# EAGLE board test3 (EAGLE 7.6.0)

No outline drawn. Coordinates in mm, seen from the top.
Copper layers (1*16): Top 0.035mm / dielectric 1.5mm / Bottom 0.035mm
Design rules "SparkFun": minimum track width 7mil, minimum drill 15mil, track to track 8mil, track to pad 8mil, pad to pad 8mil, via to via 8mil, smd to smd 8mil, copper to edge 8mil, drill to drill 8mil, minimum pad ring 12mil, minimum via ring 10mil, stop-mask expansion 4mil, vias tented up to drill 20mil, thermal gap 10mil

## Footprints (pad centres in the part's own frame; a part is rotated, then mirrored left to right if it is on the bottom)
ANTENNA-CHIP5 = smd 1.016 x 2.54: FEED -3.302,0; NC 3.302,0
BALUN = smd 0.35 x 0.8: 1 -0.65,-0.8; 2 0,-0.8; 3 0.65,-0.8; 4 0.65,0.8; 5 0,0.8; 6 -0.65,0.8
0402-CAP = smd 0.7 x 0.9: 1 -0.65,0; 2 0.65,0
EIA3216 = smd 1.4 x 1.6: A 1.4,0; C -1.4,0
MICRO-FIDUCIAL = smd 0.635 x 0.635: 1 0,0
2X3-NS = drill 1.016 pad 1.88 square: 1 -2.54,-1.27 | drill 1.016 pad 1.88 octagon: 2 -2.54,1.27; 3 0,-1.27; 4 0,1.27; 5 2.54,-1.27; 6 2.54,1.27
POWER_JACK_PTH_LOCK = drill 2.997 pad 4.115: GND 0.025,6.557; GNDBREAK 3.762,10.7 | drill 3.2 pad 4.115: PWR 0,13.878
1X02_NO_SILK = drill 1.016 pad 1.88: 1 0,0; 2 2.54,0
1X04_NO_SILK = drill 1.016 pad 1.88 square: 1 0,0 | drill 1.016 pad 1.88: 2 2.54,0; 3 5.08,0; 4 7.62,0
1X06_NS = drill 1.016 pad 1.88: 1 0,0; 2 2.54,0; 3 5.08,0; 4 7.62,0; 5 10.16,0; 6 12.7,0
JST-2-PTH = drill 0.7 pad 1.448: 1 -1,0; 2 1,0
SCREWTERMINAL-3.5MM-2-NS = drill 1.2 pad 2.032 square: 1 0,0 | drill 1.2 pad 2.032: 2 3.5,0
FTDI_BASIC = drill 1.016 pad 1.88: CTS 10.16,0; DTR 0,0; GND 12.7,0; RXI 2.54,0; TXO 5.08,0; VCC 7.62,0
LED-0603 = smd 0.8 x 0.8: A 0,-0.75; C 0,0.75
0402-RES = smd 0.7 x 0.9: 1 -0.65,0; 2 0.65,0
TACTILE_SWITCH_SMD = smd 1.524 x 0.762: 1 -2.54,1.905; 2 2.54,1.905; 3 -2.54,-1.905; 4 2.54,-1.905
SWITCH-SPST-SMD-A = smd 0.7 x 1.5: 1 -2.25,-1.75; 2 -0.75,-1.75; 3 2.25,-1.75 | smd 1 x 0.6: GND1 -3.65,1; GND3 3.65,1 | smd 1 x 0.8: GND2 -3.65,-1.1; GND4 3.65,-1.1 | hole 0.9: -1.5,0; 1.5,0
SJ_2S-TRACE = smd 0.635 x 1.27: 1 -0.508,0; 2 0.508,0
QFN-64 = smd 0.8 x 0.28: 1 -4.5,3.75; 2 -4.5,3.25; 3 -4.5,2.75; 4 -4.5,2.25; 5 -4.5,1.75; 6 -4.5,1.25; 7 -4.5,0.75; 8 -4.5,0.25; 9 -4.5,-0.25; 10 -4.5,-0.75; 11 -4.5,-1.25; 12 -4.5,-1.75; 13 -4.5,-2.25; 14 -4.5,-2.75; 15 -4.5,-3.25; 16 -4.5,-3.75; 33 4.5,-3.75; 34 4.5,-3.25; 35 4.5,-2.75; 36 4.5,-2.25; 37 4.5,-1.75; 38 4.5,-1.25; 39 4.5,-0.75; 40 4.5,-0.25; 41 4.5,0.25; 42 4.5,0.75; 43 4.5,1.25; 44 4.5,1.75; 45 4.5,2.25; 46 4.5,2.75; 47 4.5,3.25; 48 4.5,3.75 | smd 0.28 x 0.8: 17 -3.75,-4.5; 18 -3.25,-4.5; 19 -2.75,-4.5; 20 -2.25,-4.5; 21 -1.75,-4.5; 22 -1.25,-4.5; 23 -0.75,-4.5; 24 -0.25,-4.5; 25 0.25,-4.5; 26 0.75,-4.5; 27 1.25,-4.5; 28 1.75,-4.5; 29 2.25,-4.5; 30 2.75,-4.5; 31 3.25,-4.5; 32 3.75,-4.5; 49 3.75,4.5; 50 3.25,4.5; 51 2.75,4.5; 52 2.25,4.5; 53 1.75,4.5; 54 1.25,4.5; 55 0.75,4.5; 56 0.25,4.5; 57 -0.25,4.5; 58 -0.75,4.5; 59 -1.25,4.5; 60 -1.75,4.5; 61 -2.25,4.5; 62 -2.75,4.5; 63 -3.25,4.5; 64 -3.75,4.5 | smd 7.65 x 7.65: 65 0,0
SOT223 = smd 1.219 x 2.235: 1 -2.311,-3.099; 2 0,-3.099; 3 2.311,-3.099 | smd 3.6 x 2.2: 4 0,3.099
CRYSTAL-SMD-5X3 = smd 1.9 x 1.1: 1 -1.85,-1.15; 2 1.85,-1.15; 3 1.85,1.15; 4 -1.85,1.15
CRYSTAL-32KHZ-SMD = smd 2.5 x 6: SHEILD 0,5.08 | smd 1 x 2.5: X1 -1.27,0; X2 1.27,0

## Placement (x,y rotation side)
A1  ANTENNA2SMD5  [ANTENNA-CHIP5]  52.07,19.05 0 top
B1  748421245  [BALUN]  45.72,19.05 180 top
C1  1uF  [0402-CAP]  38.1,10.16 270 top
C2  1uF  [0402-CAP]  35.56,27.94 90 top
C3  1uF  [0402-CAP]  25.4,16.51 180 top
C4  1uF  [0402-CAP]  26.67,22.86 180 top
C5  12pF  [0402-CAP]  35.56,7.62 0 top
C6  12pF  [0402-CAP]  33.02,7.62 180 top
C7  12pF  [0402-CAP]  36.83,27.94 90 top
C8  12pF  [0402-CAP]  43.18,27.94 90 top
C9  0.75pF  [0402-CAP]  46.99,21.59 270 top
C10  10uF  [EIA3216]  12.7,19.05 0 top
C11  22pF  [0402-CAP]  45.72,21.59 90 top
C12  1uF  [0402-CAP]  12.7,16.51 180 top
C13  0.1uF  [0402-CAP]  12.7,31.75 180 top
C14  10uF  [EIA3216]  12.7,29.21 0 top
C15  0.1uF  [0402-CAP]  10.16,44.45 0 top
C16  JUMP  [0402-CAP]  43.18,17.78 0 top
C17  JUMP  [0402-CAP]  43.18,20.32 180 top
FID1  FIDUCIALUFIDUCIAL  [MICRO-FIDUCIAL]  1.27,52.07 0 top
FID2  FIDUCIALUFIDUCIAL  [MICRO-FIDUCIAL]  55.88,10.16 0 top
J1  ISP  [2X3-NS]  53.34,27.94 270 top
J3  POWER_JACKPTH_LOCK  [POWER_JACK_PTH_LOCK]  -2.54,11.43 270 top
JP1  [1X02_NO_SILK]  54.61,2.54 90 top
JP2  [1X04_NO_SILK]  51.94,45.72 180 top
JP3  [1X06_NS]  30.23,45.72 180 top
JP5  [1X02_NO_SILK]  32.77,45.72 0 top
JP6  [JST-2-PTH]  5.97,22.86 90 top
JP7  [1X02_NO_SILK]  1.27,21.59 90 top
JP8  [SCREWTERMINAL-3.5MM-2-NS]  3.43,21.08 90 top
JP9  FTDI  [FTDI_BASIC]  7.62,45.72 270 top
LED1  RED  [LED-0603]  16.51,15.24 0 top
LED2  GREEN  [LED-0603]  21.59,15.24 0 top
LED3  GREEN  [LED-0603]  19.05,15.24 0 top
R1  10k  [0402-RES]  53.34,33.02 0 top
R2  1k  [0402-RES]  15.24,15.24 90 top
R3  240  [0402-RES]  19.05,22.86 180 top
R4  390  [0402-RES]  19.05,20.32 180 top
R5  330  [0402-RES]  17.78,15.24 90 top
R6  330  [0402-RES]  20.32,15.24 90 top
S1  [TACTILE_SWITCH_SMD]  46.99,38.1 180 top
S2  [SWITCH-SPST-SMD-A]  9.78,1.78 180 top
SJ1  [SJ_2S-TRACE]  26.67,20.32 90 bottom
SJ2  [SJ_2S-TRACE]  40.64,25.4 90 bottom
U1  ATMEGA128RFA1  [QFN-64]  34.29,19.05 180 top
U2  LM1117  [SOT223]  12.7,24.13 90 top
Y1  16MHz  [CRYSTAL-SMD-5X3]  34.29,10.16 0 top
Y2  32.768kHz  [CRYSTAL-32KHZ-SMD]  40.01,26.67 0 top

## Library data of the parts
A1 B1 = SparkFun-RF
C1-C15 R1 R2 SJ1 SJ2 = SparkFun-Passives
C16 C17 R3-R6 S2 U2 = SparkFun
FID1 FID2 = SparkFun-Aesthetics
J1 J3 JP1-JP3 JP5-JP9 = SparkFun-Connectors
LED1-LED3 = SparkFun-LED
S1 = SparkFun-Electromechanical
U1 = SparkFun-DigitalIC
Y1 Y2 = SparkFun-FreqCtrl

## Nets
3.3V: C3.1 C4.1 C10.A C12.1 J1.2 JP9.VCC R1.2 R2.2 R3.2 U1.23 U1.34 U1.44 U1.54 U1.59 U2.2
A0: U1.63
A1: U1.64
A2: U1.1
A3: U1.2
A4: U1.3
A5: U1.4
A6: JP1.1 U1.5
A7: JP1.2 U1.6
AREF: U1.62
AVDD: C1.1 U1.60
CLKI: JP5.1 SJ1.2 U1.33
DTR: C15.1 JP9.DTR
DVDD: C2.1 U1.21 U1.22
FB: R3.1 R4.2 U2.1
GND: B1.5 C1.2 C2.2 C3.2 C4.2 C5.2 C6.2 C7.2 C8.2 C9.1 C10.C C11.2 C12.2 C13.2 C14.C J1.6 J3.GND J3.GNDBREAK JP6.1 JP7.1 JP8.1 JP9.GND LED1.C LED2.C LED3.C R4.1 S1.3 SJ1.1 SJ2.1 U1.7 U1.10 U1.20 U1.24 U1.35 U1.45 U1.55 U1.58 U1.61 U1.65
MISO: U1.39
MOSI: J1.4
N$2: LED1.A R2.1
N$3: C5.1 U1.57 Y1.3
N$4: C6.1 U1.56 Y1.1
N$5: C7.1 U1.18 Y2.X1
N$6: C8.1 U1.17 Y2.X2
N$7: B1.2 C11.1
N$8: LED3.A R5.1
N$9: J3.PWR JP6.2 JP7.2 JP8.2 S2.2
N$10: B1.4 C16.2
N$11: B1.3 C17.1
N$13: LED2.A R6.1
PB4: U1.40
PB5: U1.41
PB6: R5.2 U1.42
PB7: R6.2 U1.43
PD4: JP3.3 U1.29
PD5: JP3.4 U1.30
PD6: JP3.5 U1.31
PD7: JP3.6 U1.32
PE2: U1.48
PE3: U1.49
PE4: U1.50
PE5: U1.51
PE6: U1.52
PE7: U1.53
PG0: JP2.1 U1.14
PG1: JP2.2 U1.15
PG2: JP2.3 U1.16
PG5: JP2.4 U1.19
RESET: C15.2 J1.5 R1.1 S1.1 U1.12
RFANT: A1.FEED B1.1 C9.2
RFN: C17.2 U1.9
RFP: C16.1 U1.8
RSTON: U1.13
RX0: JP9.TXO U1.46
RX1: JP3.1 U1.27
S$1: J1.1
S$2: U1.38
SCK: J1.3 U1.37
SCL: U1.25
SDA: U1.26
SSN: U1.36
TST: JP5.2 SJ2.2 U1.11
TX0: JP9.RXI U1.47
TX1: JP3.2 U1.28
VCC: C13.1 C14.A S2.1 U2.3

## Tracks (layer width: path | path; a pad name or v marks a point on that pad's centre or on a via)
3.3V  (14 unrouted)
A6  (1 unrouted)
A7  (1 unrouted)
AVDD  (1 unrouted)
CLKI  (2 unrouted)
DTR  (1 unrouted)
DVDD  (2 unrouted)
FB  (2 unrouted)
GND  (38 unrouted)
N$2  (1 unrouted)
N$3  (2 unrouted)
N$4  (2 unrouted)
N$5  (2 unrouted)
N$6  (2 unrouted)
N$7  (1 unrouted)
N$8  (1 unrouted)
N$9  (4 unrouted)
N$10  (1 unrouted)
N$11  (1 unrouted)
N$13  (1 unrouted)
PB6  (1 unrouted)
PB7  (1 unrouted)
PD4  (1 unrouted)
PD5  (1 unrouted)
PD6  (1 unrouted)
PD7  (1 unrouted)
PG0  (1 unrouted)
PG1  (1 unrouted)
PG2  (1 unrouted)
PG5  (1 unrouted)
RESET  (4 unrouted)
RFANT  (2 unrouted)
RFN  (1 unrouted)
RFP  (1 unrouted)
RX0  (1 unrouted)
RX1  (1 unrouted)
SCK  (1 unrouted)
TST  (2 unrouted)
TX0  (1 unrouted)
TX1  (1 unrouted)
VCC  (3 unrouted)